# Altium PCB 宁波2号线PIS_数字功率放大器_接口板(BHC-A-2030-03)_PCB(06001538)_V1.0.PcbDoc
Units mil, origin at the board's own origin, x right, y up, seen from the top; angles counter-clockwise.
Board outline 1574.8 x 3937.01 mil, 2 copper layers (Top Layer, Bottom Layer); 6 components, 9 nets, 30 pads, 0 vias.
Unrouted connection lines stored in the file: 1.
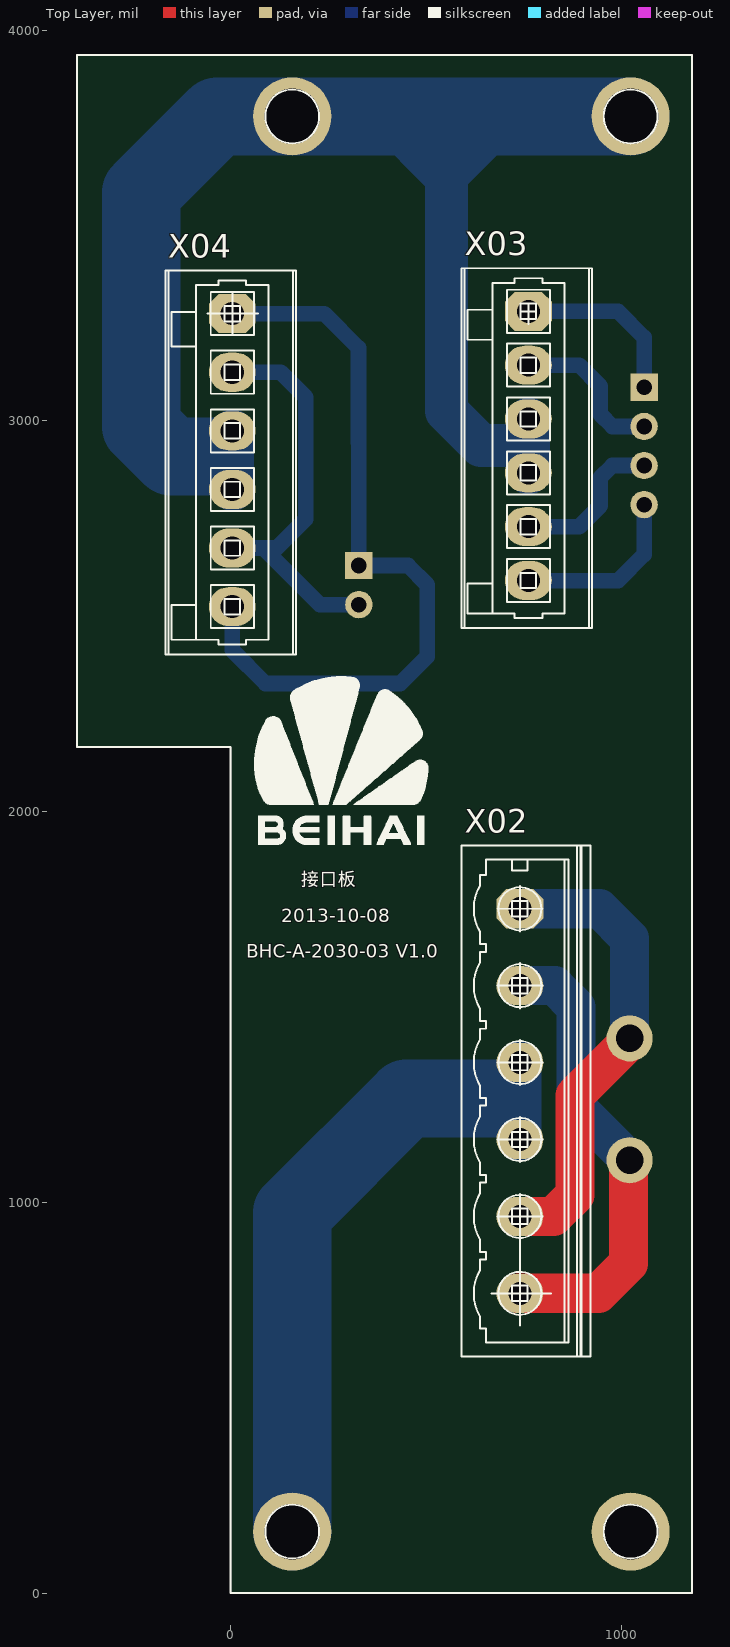
[diagram p0: Top Layer view]
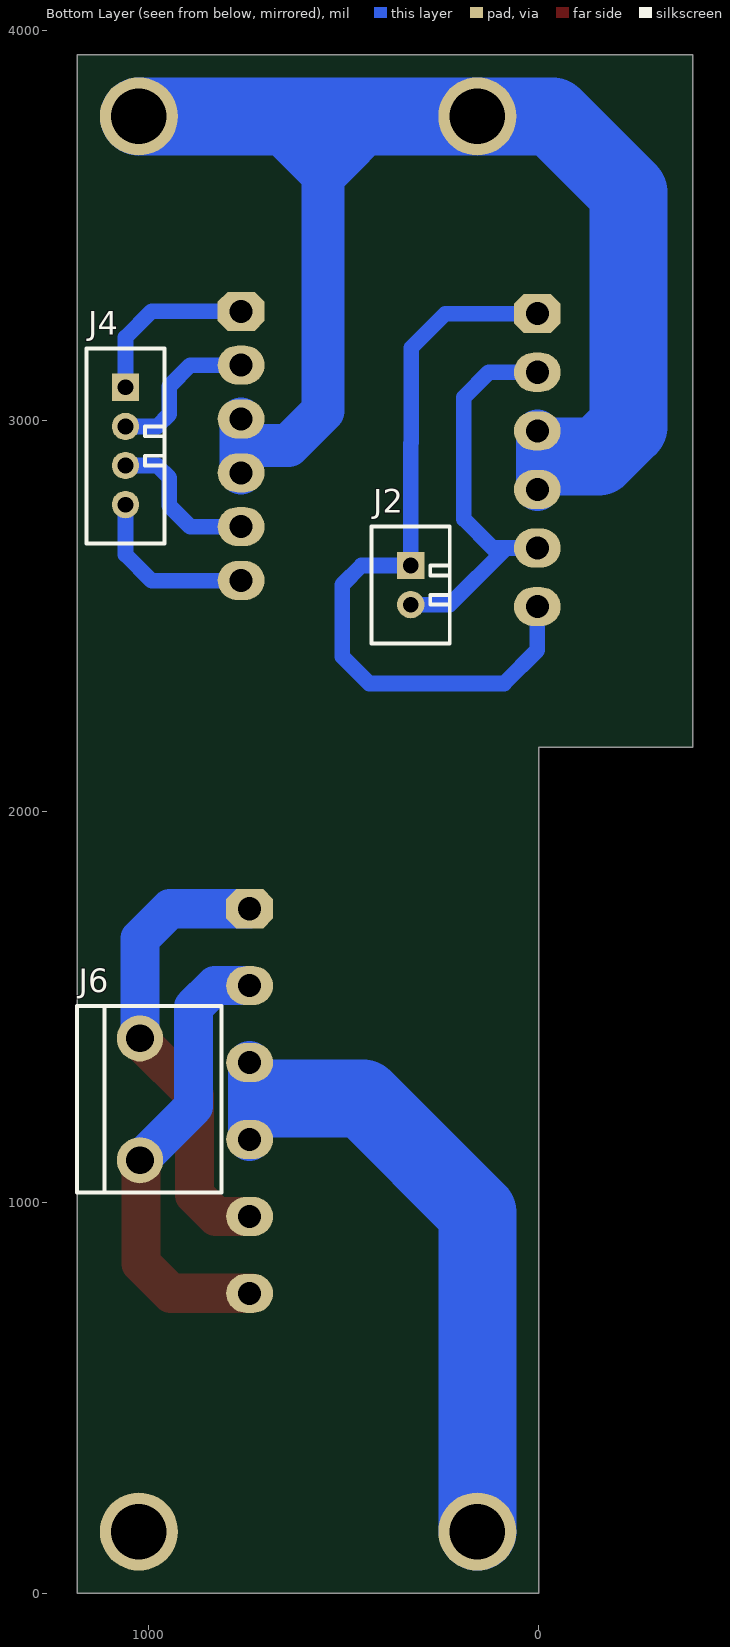
[diagram p1: Bottom Layer view, seen from below]
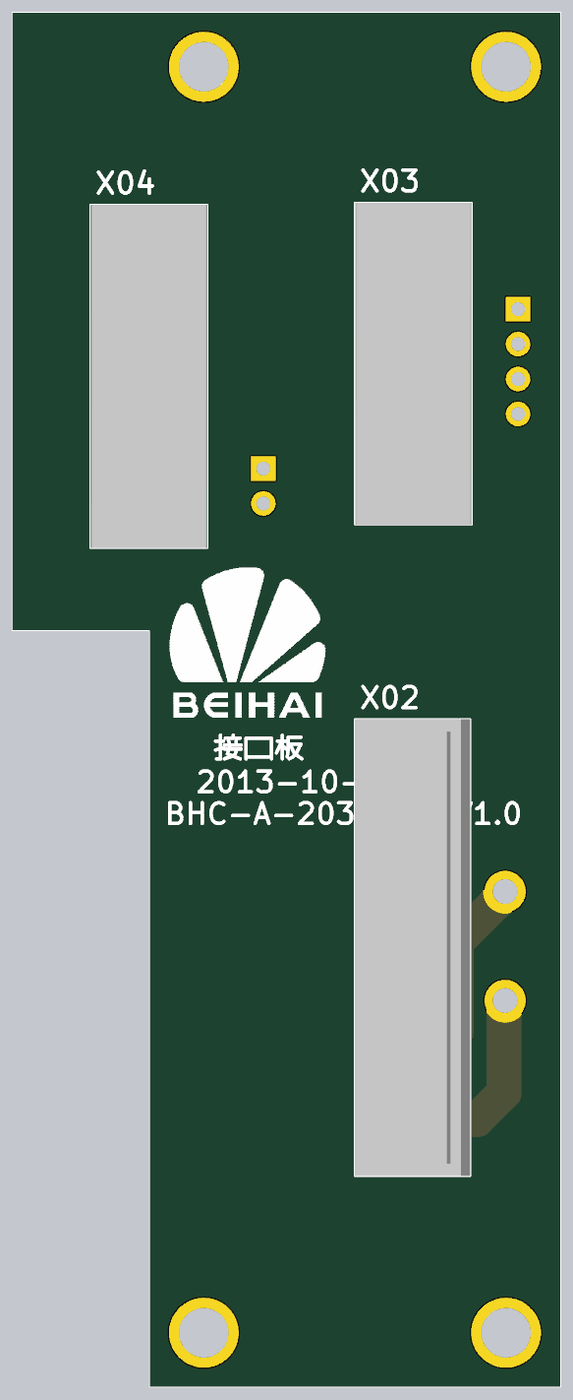
[diagram p2: 3D render of the assembled board from above, using the file's embedded part models]

## Layer stack, top to bottom
Top Layer: signal copper 1.4
Dielectric: dielectric 12.6, FR-4, Dk 4.8
Bottom Layer: signal copper 1.4

## Board outline
-393.7,2165.36 0,2165.36 0,0 1181.1,0 1181.1,3937.01 -393.7,3937.01

## Design rules (kind name [scope] priority, off if disabled: settings)
Clearance [All] p1: gap=10
ComponentClearance [All] p1: gap=0 collisioncheckmode=3 verticalgap=0 showdistances=FALSE
Height [All] p1: minheight=0 maxheight=500 prefheight=50
HoleSize [All] p1: absolutevalues=TRUE maxlimit=1000 minlimit=1 maxpercent=80.000 minpercent=20.000
HoleToHoleClearance [All] p1: gap=0 allowstackedmicrovias=TRUE
MinimumSolderMaskSliver [All] p1: minsoldermaskwidth=0
PolygonConnect [All] p1: connectstyle=Relief reliefconductorwidth=10 reliefentries=4 polygonreliefangle="90 Angle" airgapwidth=10
RoutingVias [All] p1: holewidth=28 width=50 viastyle="Through Hole" minholewidth=28 minwidth=50 maxholewidth=500 maxwidth=800
SilkToSilkClearance [All] p1: silktosilkclearance=0
SilkToSolderMaskClearance [IsPad] p1: minsilkscreentomaskgap=0 clearancetoexposedcopper=TRUE
SolderMaskExpansion [All] p1: expansion=4
Width [All] p1: maxlimit=1000 minlimit=10 preferedwidth=20 minimp=50.000000 maximp=50.000000 favimp=50.000000
21 further rules are at their usual default settings.

## Components (designator, comment, footprint, x,y, rotation, side; value= is the part's Value field where it differs from the comment)
J2 "CON2" CH2.54-2 328,2630 r270 bottom
J4 "CON4" CH2.54-4 1058,3086 r270 bottom
J6 "CON2" CH3.96-3P+ 1021,1108 r90 bottom
X02 "231-136" wago-231-136 740.16,1751.57 r90 top locked
X03 "734-136" wago-734-136 762.01,3280.71 r90 top locked
X04 "734-236" WAGO-734-236 4.02,3274.8 r90 top locked

## Footprints (in the part's own frame and the unit in brackets; to place one, negate y for a bottom-side part, rotate by r counter-clockwise, add the part's x,y. Pads: shape width x height; smd on the part's side, far side on the other; paste and mask are expansions set on the pad)
CH2.54-2 [mil]
  rect 70x70 hole 40: 1(0,0)
  round 70 hole 40: 2(100,0)
  silkscreen extent -100,-100 200,100, body extent -100,-100 200,100, height 276
CH2.54-4 [mil]
  rect 70x70 hole 40: 1(0,0)
  round 70 hole 40: 2(100,0) 3(200,0) 4(300,0)
  silkscreen extent -100,-100 400,100
CH3.96-3P+ [mm]
  round 3 hole 1.8: 1(0,0) 2(7.92,0)
  silkscreen extent -2.1,-5.3 10.02,4.1, body extent -2.1,-5.3 10.02,4.1, height 14.6
wago-231-136 [mm] "5"
  oct 2.54x3.048 hole 1.5: 1(0,0)
  oval 2.54x3.048 hole 1.5: 2(-5,0) 3(-10,0) 4(-15,0) 5(-20,0) 6(-25,0)
  silkscreen extent -29.1,-4.6 4.1,3.8, body extent -29.09,-4.59 4.11,3.81, height 12
wago-734-136 [mil] "3.5"
  oct 100x120 hole 59.06: 1(0.02,0)
  oval 100x120 hole 59.06: 2(-137.77,0) 3(-275.57,0) 4(-413.36,0) 5(-551.16,0) 6(-688.95,0)
  silkscreen extent -811,-163 110,171, body extent -811,-164 110,171, height 406
WAGO-734-236 [mil] "3.81"
  oct 100x120 hole 59.06: 1(0,0)
  oval 100x120 hole 59.06: 2(-150,0) 3(-300,0) 4(-450,0) 5(-600,0) 6(-750,0)
  silkscreen extent -872,-163 110,171, body extent -872,-164 110,171, height 406

## Part data
J2 J6: "Connector"
X02 X03 X04: library part CON6

## Free pads (board coordinates)
  round 200 hole 141.73: 0(157.48,157.48) 0(157.48,3779.53) 0(1023.62,157.48) 0(1023.62,3779.53)

## Nets (pads, with @x,y where several pads share a name; then routed paths per layer and width w, separated by ;. In a path a pad name is that pad's centre, name@x,y a point inside that pad or via, vN(x,y) a via of type N, cw(c..) or ccw(c..) an arc to the next point about the centre after c; other vN are vias at no path point)
NOISE-OUT1A: J4.1 X03.1 | length 451.6
  Bottom Layer w40: X03.1 991.27,3280.73 1058,3214 J4.1
NOISE-OUT1B: J4.2 X03.2 | length 403.2
  Bottom Layer w40: X03.2 892.06,3142.94 946,3089 946,3017 977,2986 J4.2
NOISE-OUT2A: J4.3 X03.5 | length 403.2
  Bottom Layer w40: X03.5@762.01,2729.06 892.06,2729.06 946,2783 946,2855 977,2886 J4.3
NOISE-OUT2B: J4.4 X03.6 | length 451.6
  Bottom Layer w40: X03.6@762.01,2591.27 991.27,2591.27 1058,2658 J4.4
PA-AUDIO-TRAIN+: J2.2 X04.2 X04.5 | length 1049.9
  Bottom Layer w40: X04.5 83.2,2674.8 ; X04.2 128.2,3124.8 192,3061 192,2749 117.8,2674.8 83.2,2674.8 ; J2.2 228,2530 83.2,2674.8
PA-AUDIO-TRAIN-: J2.1 X04.1 X04.6 | length 1970.6
  Bottom Layer w40: X04.6 4.02,2412.98 89,2328 434,2328 503,2397 503,2581 454,2630 J2.1 328,2943 327,2944 327,3187 239.2,3274.8 X04.1
PE: pad.0@157.48,157.48 pad.0@157.48,3779.53 pad.0@1023.62,3779.53 X02.3 X02.4 X03.3 X03.4 X04.3 X04.4 | length 5384.9
  Bottom Layer w110: X04.4 X04.3 ; 396.47,3779.53 548,3628 ; 703.53,3779.53 552,3628 552,3026 641,2937 762.01,2937 ; X02.4 X02.3 ; X03.4 762.01,2937 ; X03.3 762.01,2937
  Bottom Layer w200: -43,2909 -152,2909 -229,2986 -229,3585 -34.47,3779.53 157.48,3779.53 396.47,3779.53 703.53,3779.53 pad.0@1023.62,3779.53 ; pad.0@157.48,157.48 157.48,973.48 450,1266 693,1266
SPK1/AUDIO+: J6.2 X02.1 X02.5 | length 1183
  Top Layer w100: X02.5@737.16,964.28 826.28,964.28 881,1019 881,1274 J6.2@1018,1411
  Bottom Layer w100: X02.1 944.43,1751.57 1021,1675 J6.2
SPK1/AUDIO-: J6.1 X02.2 X02.6 | length 1183
  Top Layer w100: X02.6@737.16,767.43 941.43,767.43 1018,844 J6.1@1018,1099.19
  Bottom Layer w100: X02.2 829.28,1554.72 884,1500 884,1245 J6.1

## Silkscreen, mask and mechanical layers (free items; w line width, h text height)
Top Overlay:
  drawing of 1383 lines, arcs and shapes, not listed
  text "接口板" at 179,1799 h59.06
  text "2013-10-08" at 129,1705 h59.06
  text "BHC-A-2030-03 V1.0" at 39.37,1614.17 h59.06
Mechanical 2:
  the board outline again, w5
  text "机械层2  定义外形尺寸" at 39.37,-275.59 h150